# EAGLE board Sensor de Iluminação - Vinheira Agnello - Cp1 Edge Computing (EAGLE 9.7.0)

Size 260.98 x 78.32 mm. Coordinates in mm from the lower left corner, seen from the top.
Outline: 0,0 260.98,0 260.98,78.32 0,78.32 0,0
Copper layers (1*16): Top 0.035mm / dielectric 1.5mm / Bottom 0.035mm
Design rules "default": minimum track width 6mil, minimum drill 0.35mm, track to track 6mil, track to pad 6mil, pad to pad 6mil, via to via 6mil, smd to smd 6mil, copper to edge 40mil, drill to drill 6mil, minimum pad ring 10mil, minimum via ring 8mil, stop-mask expansion 4mil, vias tented up to drill 0mil, thermal gap 10mil

## Footprints (pad centres in the part's own frame; a part is rotated, then mirrored left to right if it is on the bottom)
LEDRD254W60D565H860B = drill 0.981 pad 1.581: 1 -1.27,0; 2 1.27,0
LEDRD254W60D565H860B_Y = drill 0.981 pad 1.581: 1 -1.27,0; 2 1.27,0
LEDRD254W60D565H860B_G = drill 0.981 pad 1.581: 1 -1.27,0; 2 1.27,0
PIEZO = drill 1 pad 1.6: 1 -3.5,0; 2 3.5,0
RESAD1016W63L850D250B = drill 0.83 pad 1.43: 1 -5.08,0; 2 5.08,0
GL5528 = drill 0.8 pad 1.4: 1 -1.702,0; 2 1.702,0
ARDUINO-UNO-R3-SHIELD = drill 1.016 pad 1.88: 3.3V 24.13,-2.54; 5V 24.13,0; A0 24.13,12.7; A1 24.13,15.24; A2 24.13,17.78; A3 24.13,20.32; A4 24.13,22.86; A5 24.13,25.4; AREF -24.13,-13.97; D2 -24.13,20.32; D3 -24.13,17.78; D4 -24.13,15.24; D5 -24.13,12.7; D6 -24.13,10.16; D7 -24.13,7.62; D8 -24.13,3.81; D9 -24.13,1.27; D10 -24.13,-1.27; D11 -24.13,-3.81; D12 -24.13,-6.35; D13 -24.13,-8.89; GND@0 24.13,2.54; GND@1 24.13,5.08; GND@2 -24.13,-11.43; IOREF 24.13,-7.62; NC 24.13,-10.16; RES 24.13,-5.08; RX -24.13,25.4; SCL -24.13,-19.05; SDA -24.13,-16.51; TX -24.13,22.86; VIN 24.13,7.62
JHD-162A = drill 1.016 long: 1 -19.05,0; 2 -16.51,0; 3 -13.97,0; 4 -11.43,0; 5 -8.89,0; 6 -6.35,0; 7 -3.81,0; 8 -1.27,0; 9 1.27,0; 10 3.81,0; 11 6.35,0; 12 8.89,0; 13 11.43,0; 14 13.97,0; 15 16.51,0; 16 19.05,0

## Placement (x,y rotation side)
D1  RED  [LEDRD254W60D565H860B]  206.66,54.28 0 top
D2  YELLOW  [LEDRD254W60D565H860B_Y]  232.06,54.28 0 top
D3  GREEN  [LEDRD254W60D565H860B_G]  254.92,54.28 0 top
PIEZO1  PIEZO  [PIEZO]  171.1,61.9 180 top
R1  330  [RESAD1016W63L850D250B]  146.97,66.98 90 top
R2  150  [RESAD1016W63L850D250B]  248.57,56.82 180 top
R3  150  [RESAD1016W63L850D250B]  200.31,56.82 180 top
R4  150  [RESAD1016W63L850D250B]  225.71,56.82 180 top
R5  PHOTOCELL_GL5528  [GL5528]  211.74,46.66 0 top
R6  10k  [RESAD1016W63L850D250B]  218.09,41.58 0 top
U1  ARDUINO-UNO-R3-SHIELD  [ARDUINO-UNO-R3-SHIELD]  47.88,48.47 270 top
U2  LCD-16X2JHD-162A  [JHD-162A]  130.46,36.63 0 top

## Library data of the parts
D1 = Tinkercad; CATEGORY: Opto-Electronic; SUB-CATEGORY: LED; VALUE: LED_RED
D2 = Tinkercad; CATEGORY: Opto-Electronic; SUB-CATEGORY: LED; VALUE: LED_YELLOW
D3 = Tinkercad; CATEGORY: Opto-Electronic; SUB-CATEGORY: LED; VALUE: LED_GREEN
PIEZO1 R1-R6 U1 U2 = Tinkercad

## Nets
D1_A: D1.1 R3.1
D2_A: D2.1 R4.1
D3_A: D3.1 R2.1
U1_5V: R1.2 R5.1 U1.5V U2.2
U1_A0: R5.2 R6.1 U1.A0
U1_D2: U1.D2 U2.14
U1_D3: U1.D3 U2.13
U1_D4: U1.D4 U2.12
U1_D5: U1.D5 U2.11
U1_D6: R2.2 U1.D6
U1_D7: R4.2 U1.D7
U1_D8: R3.2 U1.D8
U1_D9: PIEZO1.1 U1.D9
U1_D10: U1.D10 U2.6
U1_D11: U1.D11 U2.5
U1_D12: U1.D12 U2.4
U1_GND: D1.2 D2.2 D3.2 PIEZO1.2 R6.2 U1.GND@0 U1.GND@1 U1.GND@2 U2.1 U2.3 U2.16
U2_LED+: R1.1 U2.15

## Tracks (layer width: path | path; a pad name or v marks a point on that pad's centre or on a via)
D1_A  (1 unrouted)
D2_A  (1 unrouted)
D3_A  (1 unrouted)
U1_5V  (3 unrouted)
U1_A0  (2 unrouted)
U1_D2  (1 unrouted)
U1_D3  (1 unrouted)
U1_D4  (1 unrouted)
U1_D5  (1 unrouted)
U1_D6  (1 unrouted)
U1_D7  (1 unrouted)
U1_D8  (1 unrouted)
U1_D9  (1 unrouted)
U1_D10  (1 unrouted)
U1_D11  (1 unrouted)
U1_D12  (1 unrouted)
U1_GND  (10 unrouted)
U2_LED+  (1 unrouted)